# Altium PCB PCB_TRAFFIC LIGHT.PcbDoc
Units mm, origin at the board's own origin, x right, y up, seen from the top; angles counter-clockwise.
Board outline 100 x 100 mm, 2 copper layers (Top Layer, Bottom Layer); 35 components, 58 nets, 149 pads, 0 vias.
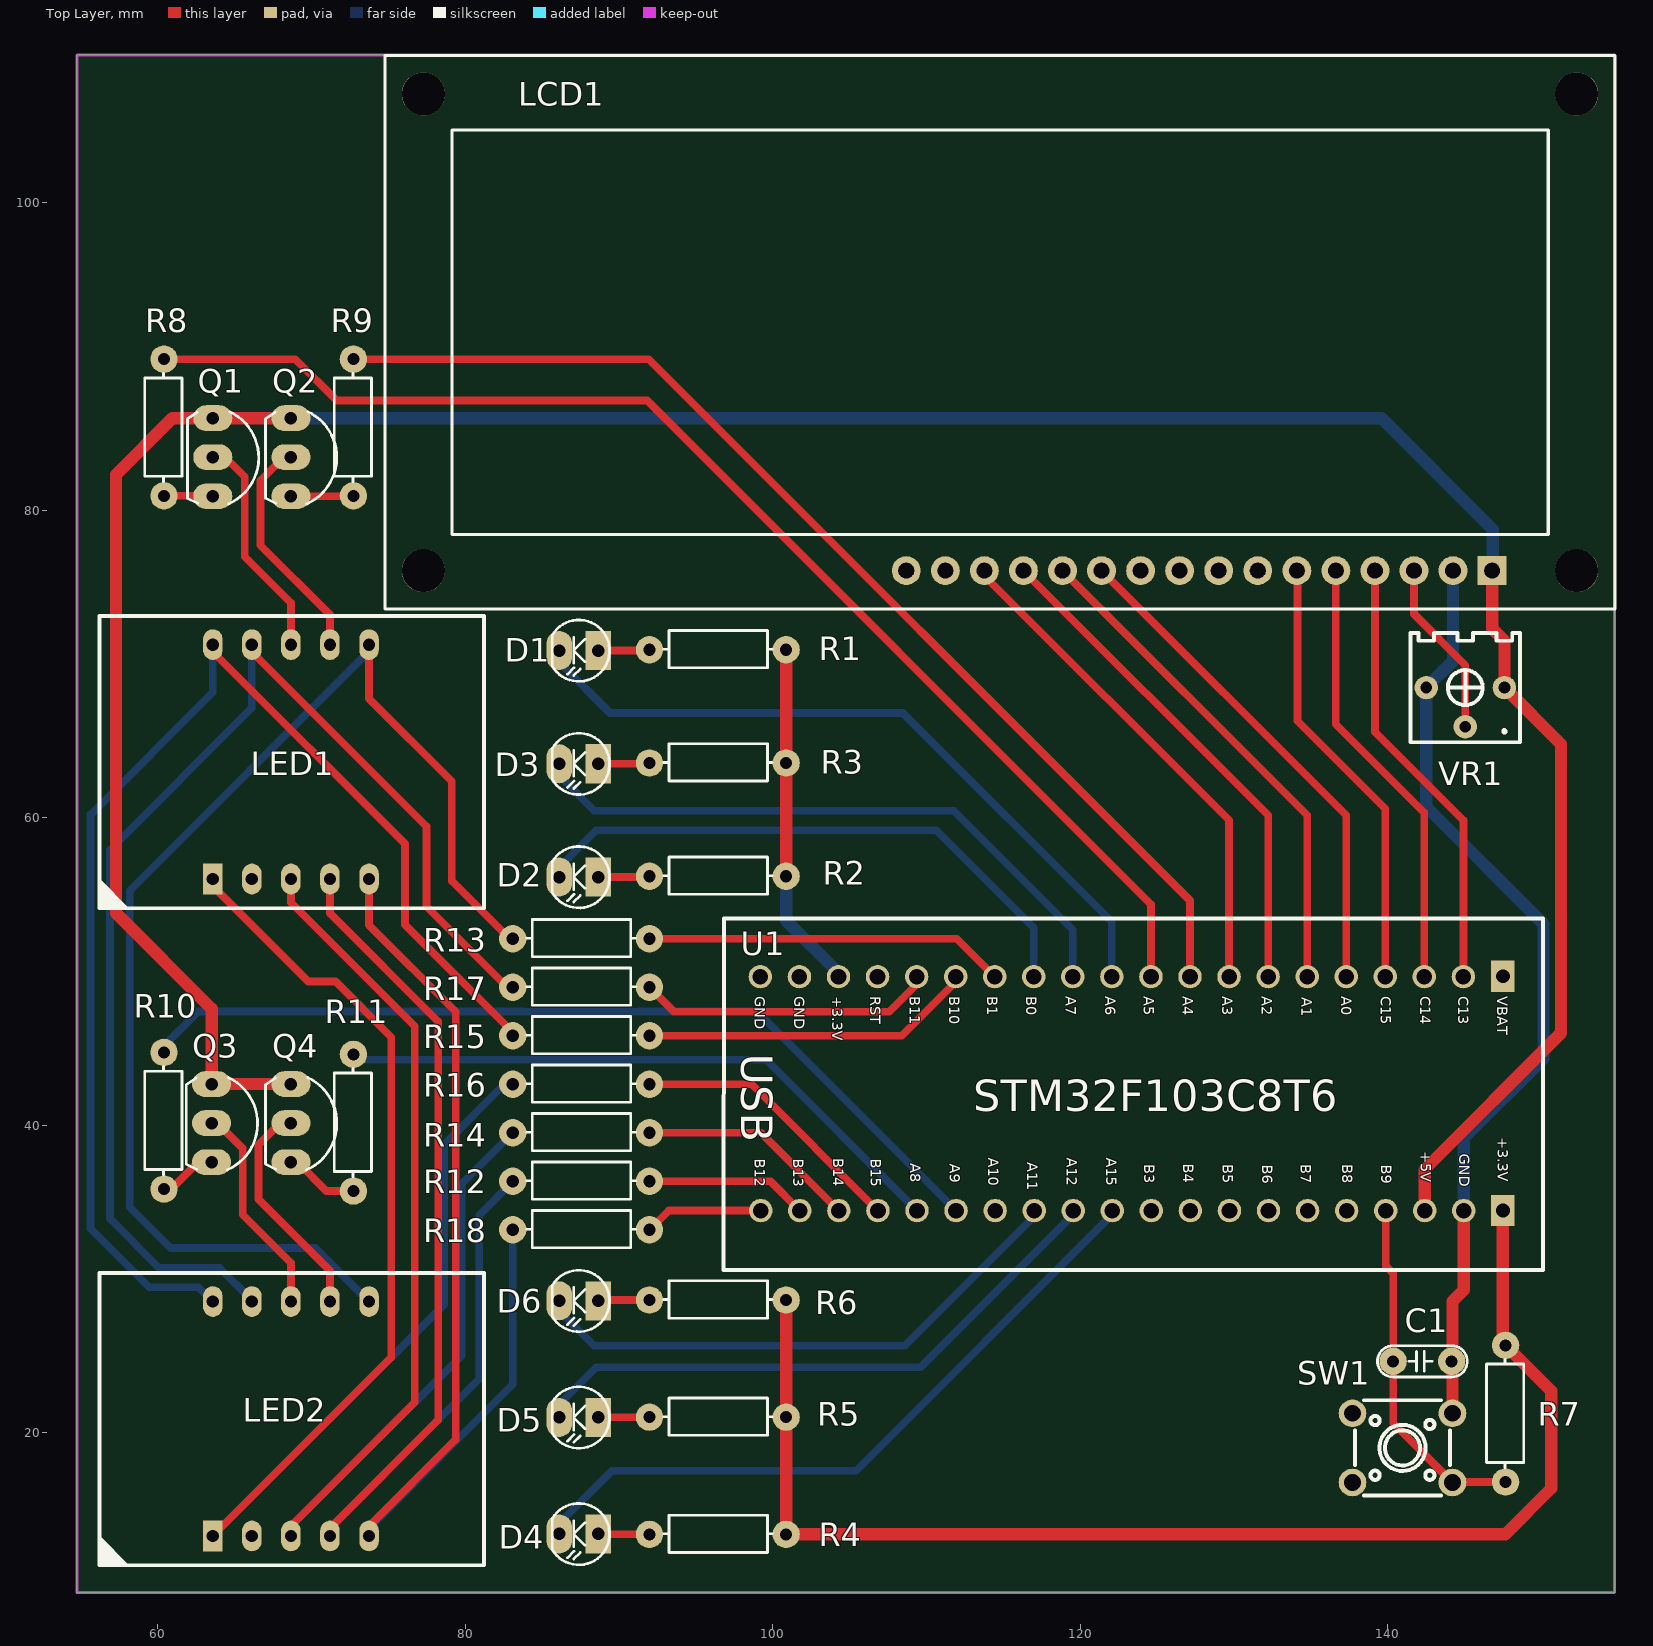
[diagram p0: Top Layer view]
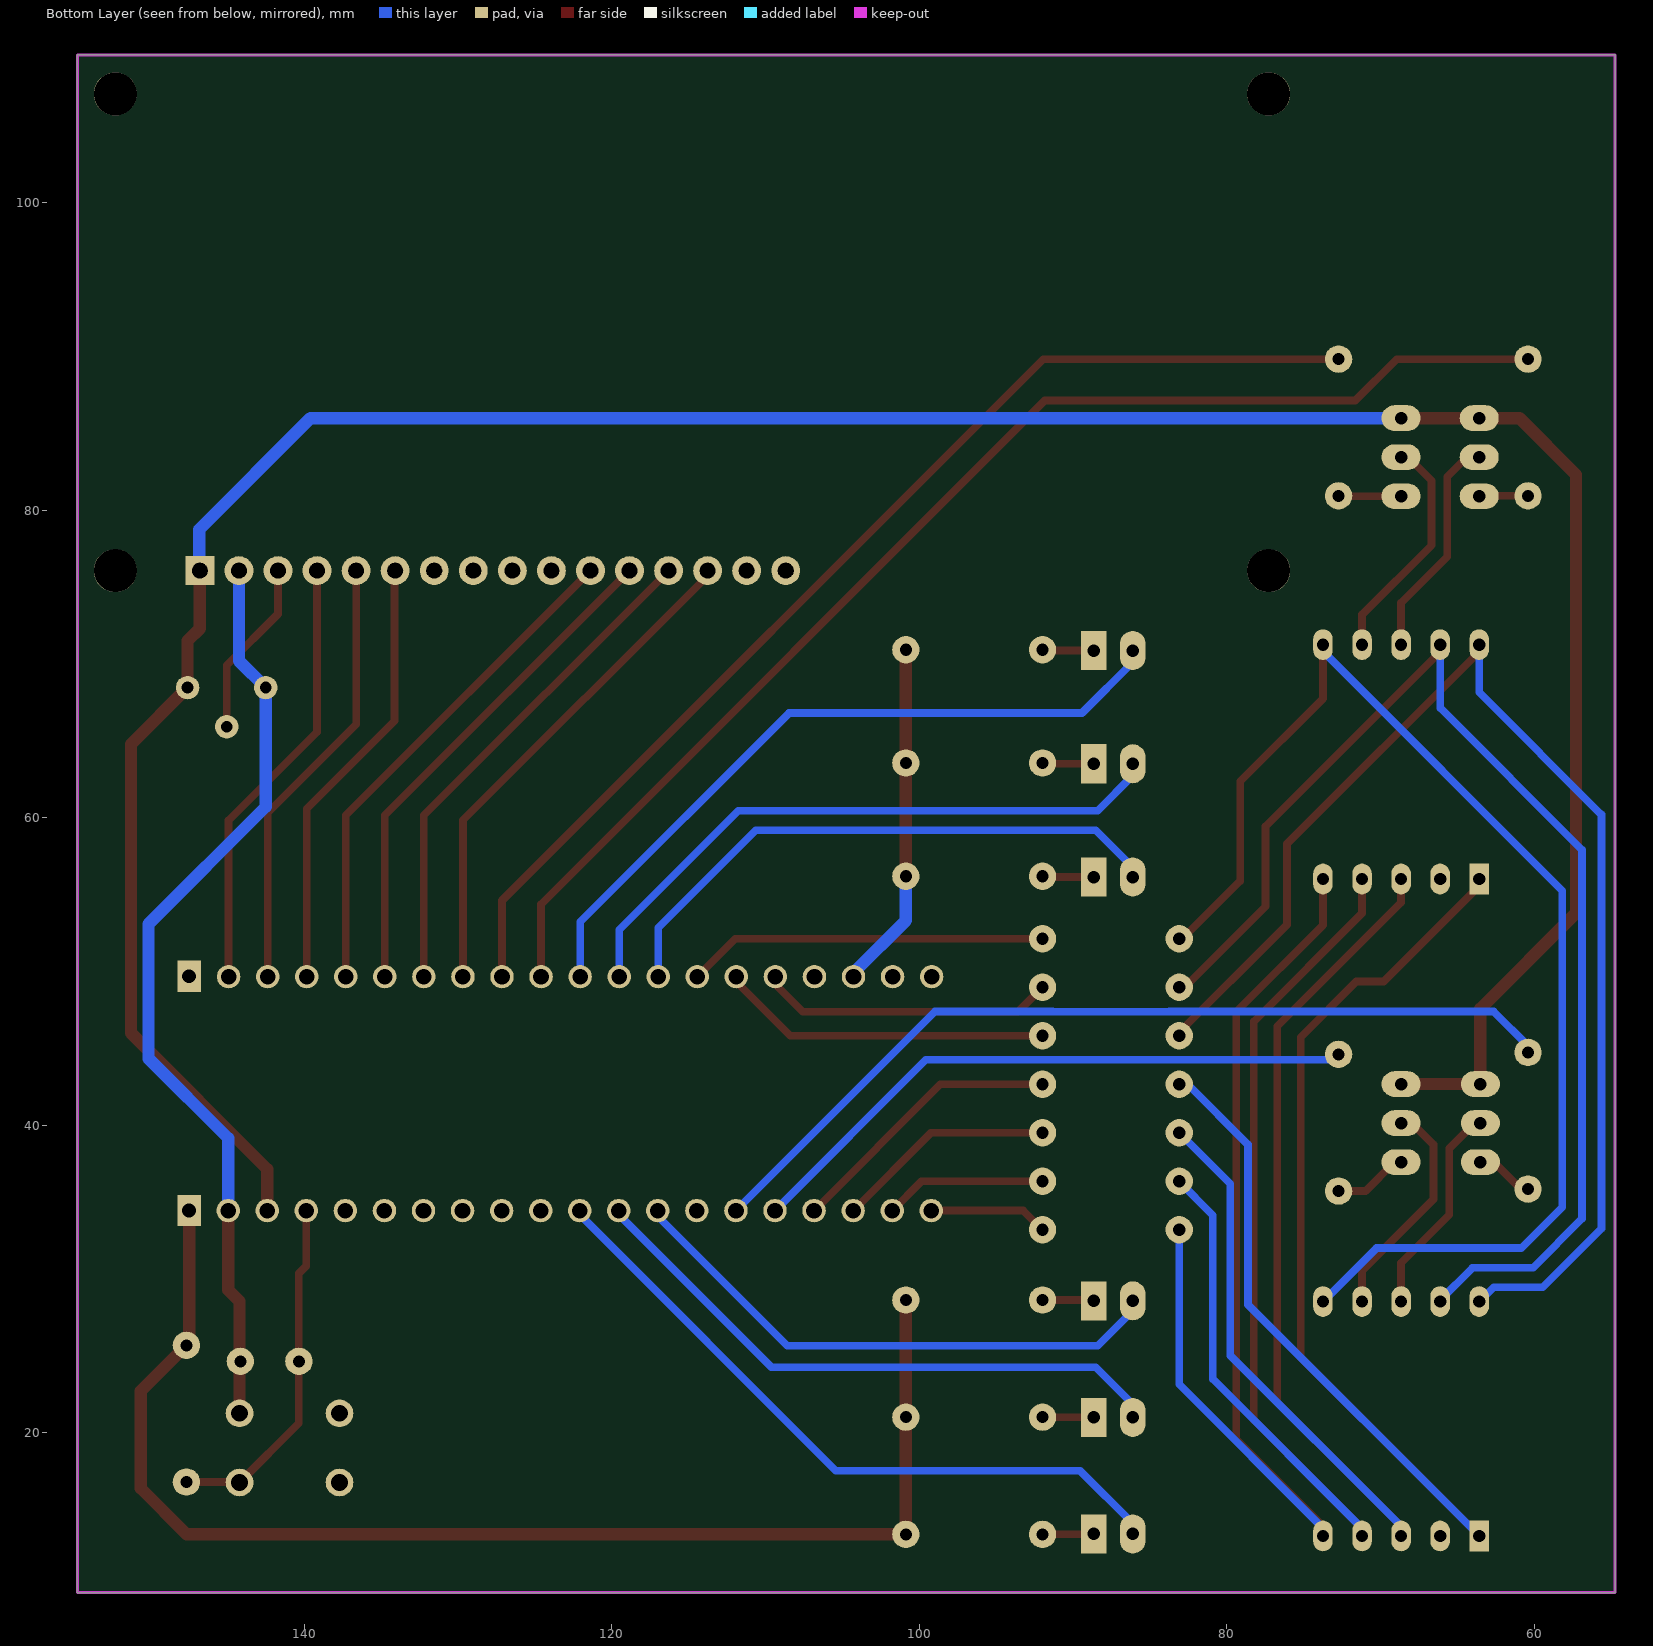
[diagram p1: Bottom Layer view, seen from below]
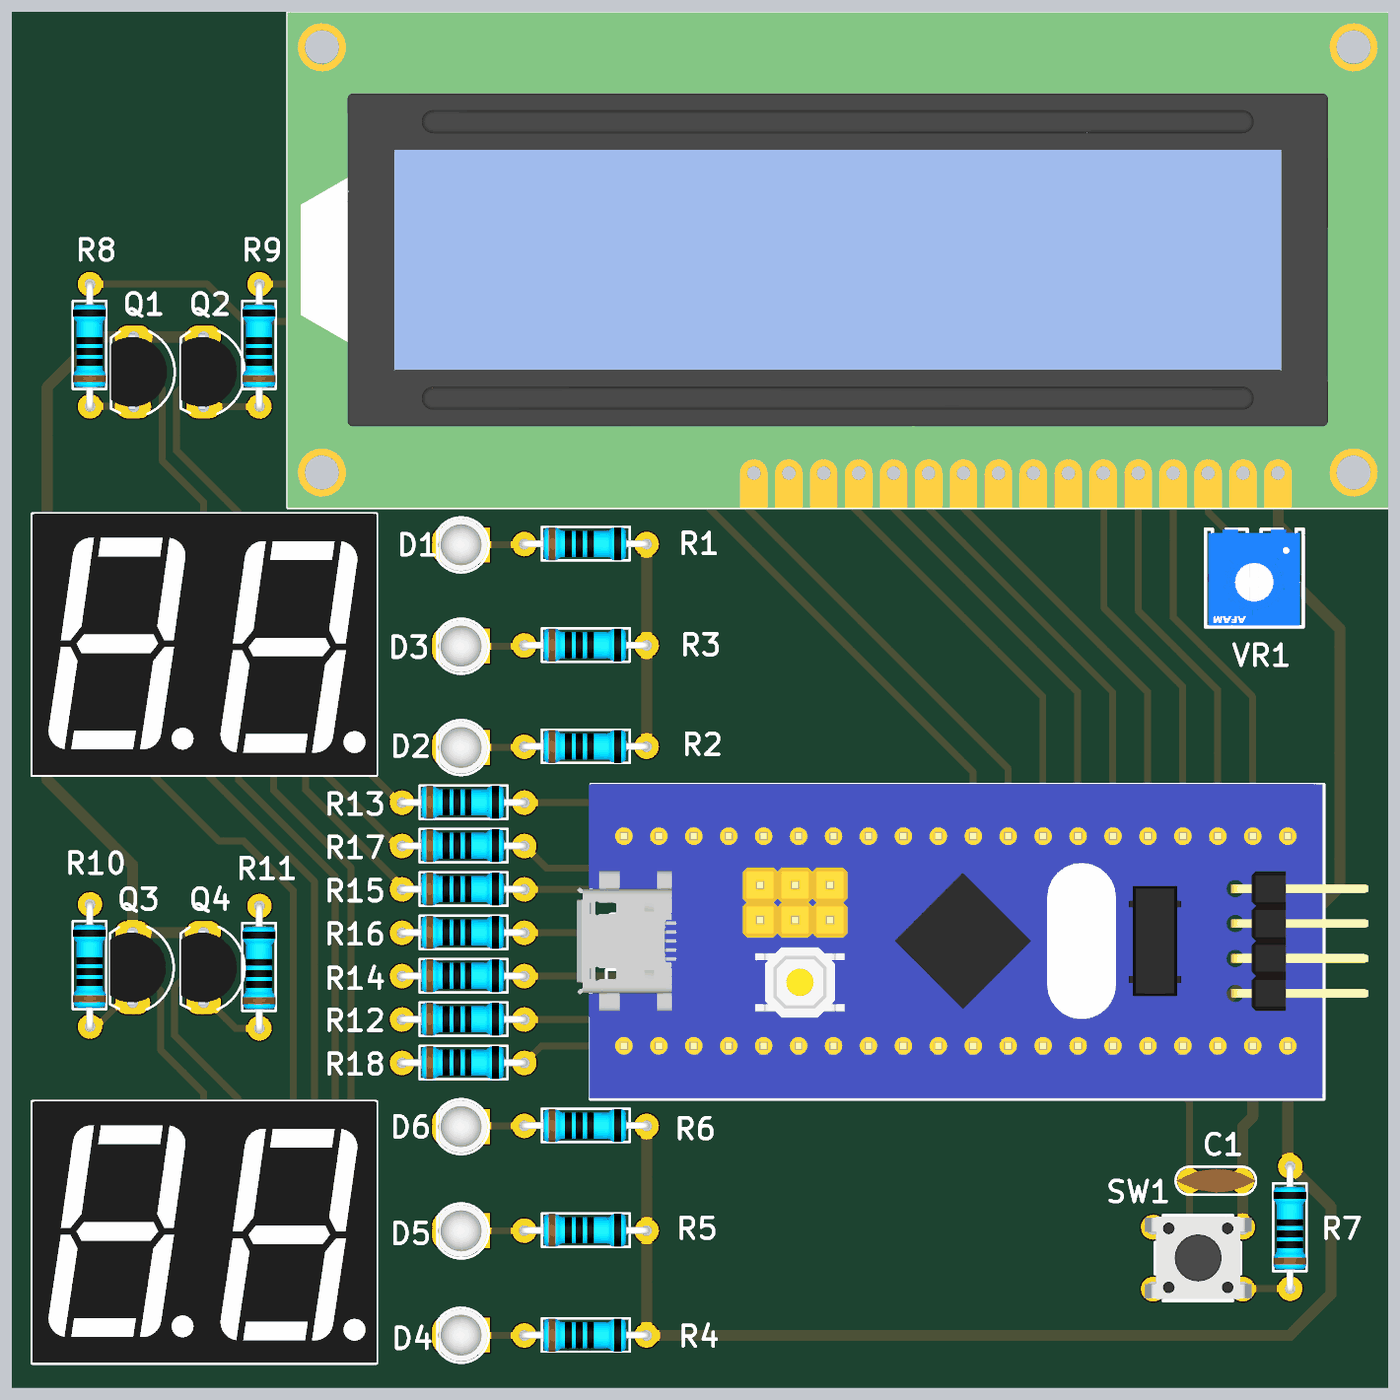
[diagram p2: 3D render of the assembled board from above, using the file's embedded part models]

## Layer stack, top to bottom
Top Solder: solder mask 0.0102, Solder Resist, Dk 3.5
Top Layer: signal copper 0.0356
Dielectric 1: dielectric 0.32, FR-4, Dk 4.8
Bottom Layer: signal copper 0.0356
Bottom Solder: solder mask 0.0102, Solder Resist, Dk 3.5

## Board outline
54.737,9.601 154.737,9.601 154.737,109.601 54.737,109.601

## Design rules (kind name [scope] priority, off if disabled: settings)
Clearance [All] p1: gap=0.432 ignorepadtopadclearanceinfootprint=FALSE
PolygonConnect [All] p1: connectstyle=Relief reliefconductorwidth=0.254 reliefentries=4 polygonreliefangle="90 Angle" airgapwidth=0.254
RoutingVias [All] p1: holewidth=0.711 width=1.27 viastyle="Through Hole" minholewidth=0.711 minwidth=1.27 maxholewidth=0.711 maxwidth=1.27
SolderMaskExpansion [All] p1: expansion=0.102
Width [All] p1: maxlimit=0.8 minlimit=0.254 preferedwidth=0.5 minimp=50.000000 maximp=50.000000 favimp=50.000000
30 further rules are at their usual default settings.

## Components (designator, comment, footprint, x,y, rotation, side; value= is the part's Value field where it differs from the comment)
C1 "100nF" CN1.5 140.335,24.638 r0 top
D1 "LED" LED-3 88.646,70.866 r180 top
D2 "LED" LED-3 88.646,56.134 r180 top
D3 "LED" LED-3 88.646,63.5 r180 top
D4 "LED" LED-3 88.646,13.411 r180 top
D5 "LED" LED-3 88.646,20.993 r180 top
D6 "LED" LED-3 88.646,28.575 r180 top
LCD1 "LCD 16x02" "LCD DISPLAYS 16X2" 114.408,90.424 r180 top
LED1 "5621BS" "LED 7 SEG-2 0.56 inch" 68.834,62.027 r0 top
LED2 "5621BS" "LED 7 SEG-2 0.56 inch" 68.834,19.304 r0 top
Q1 "A1015" TO-92 63.525,83.439 r270 top
Q2 "A1015" TO-92 68.605,83.439 r270 top
Q3 "A1015" TO-92 63.449,40.132 r270 top
Q4 "A1015" TO-92 68.605,40.132 r270 top
R1 "220R" "RES CHIPS HOLD 1/4W TYPE 350MIL" 97.536,69.088 r0 top
R2 "220R" "RES CHIPS HOLD 1/4W TYPE 350MIL" 97.536,54.356 r0 top
R3 "220R" "RES CHIPS HOLD 1/4W TYPE 350MIL" 97.536,61.722 r0 top
R4 "220R" "RES CHIPS HOLD 1/4W TYPE 350MIL" 97.536,11.557 r0 top
R5 "220R" "RES CHIPS HOLD 1/4W TYPE 350MIL" 97.536,19.177 r0 top
R6 "220R" "RES CHIPS HOLD 1/4W TYPE 350MIL" 97.536,26.797 r0 top
R7 "10K" "RES CHIPS HOLD 1/4W TYPE 350MIL" 149.479,22.352 r90 top
R8 "10K" "RES CHIPS HOLD 1/4W TYPE 350MIL" 62.23,86.487 r90 top
R9 "10K" "RES CHIPS HOLD 1/4W TYPE 350MIL" 74.549,86.487 r90 top
R10 "10K" "RES CHIPS HOLD 1/4W TYPE 350MIL" 62.23,41.402 r90 top
R11 "10K" "RES CHIPS HOLD 1/4W TYPE 350MIL" 74.549,41.275 r90 top
R12 "220R" "RES CHIPS HOLD 1/4W TYPE 350MIL" 88.646,34.523 r0 top
R13 "220R" "RES CHIPS HOLD 1/4W TYPE 350MIL" 88.646,50.292 r0 top
R14 "220R" "RES CHIPS HOLD 1/4W TYPE 350MIL" 88.646,37.677 r0 top
R15 "220R" "RES CHIPS HOLD 1/4W TYPE 350MIL" 88.646,43.984 r0 top
R16 "220R" "RES CHIPS HOLD 1/4W TYPE 350MIL" 88.646,40.83 r0 top
R17 "220R" "RES CHIPS HOLD 1/4W TYPE 350MIL" 88.646,47.138 r0 top
R18 "220R" "RES CHIPS HOLD 1/4W TYPE 350MIL" 88.646,31.369 r0 top
SW1 "Switch 6x6" "SWITCHES TACTILE DIP 6X6x5 mm" 141.097,18.923 r90 top
U1 "STM32F103C8T6" "MODULE STM32F103C8T6" 121.437,41.961 r270 top
VR1 "10K" "RES VARIABLE HOLE 3362P" 145.085,68.402 r180 top

## Footprints (in the part's own frame and the unit in brackets; to place one, negate y for a bottom-side part, rotate by r counter-clockwise, add the part's x,y. Pads: shape width x height; smd on the part's side, far side on the other; paste and mask are expansions set on the pad)
CN1.5 [mil]
  round 70 hole 31: 1(0,0) 2(150,0)
  silkscreen extent -40,-40 190,40, body extent -40,-33 190,33, height 235
"LCD DISPLAYS 16X2" [mil]
  rect 74x74 hole 40 slot 40.2 at 0 deg: 1(-1274.22,565.48)
  round 74 hole 40 slot 40.2 at 0 deg: 2(-1174.22,565.48) 3(-1074.22,565.48) 4(-974.22,565.48) 5(-874.22,565.48) 6(-774.22,565.48) 7(-674.22,565.48) 8(-574.22,565.48) 9(-474.22,565.48) 10(-374.22,565.48) 11(-274.22,565.48) 12(-174.22,565.48) 13(-74.22,565.48) 14(25.78,565.48) 15(125.78,565.48) 16(225.78,565.48)
  round 110.24 hole 110.24 unplated: ""(-1490.75,565.48) ""(-1490.75,-655) ""(1462,565.48) ""(1462,-655)
  silkscreen extent -1589,-753 1560,664, body extent -1589,-754 1561,663, height 478
"LED 7 SEG-2 0.56 inch" [mm]
  rect 1.27x2 hole 0.8: 1(-5.258,-6.02)
  oval 1.27x2 hole 0.8: 2(-2.718,-6.02) 3(-0.178,-6.02) 4(2.362,-6.02) 5(4.902,-6.02) 6(4.902,9.22) 7(2.362,9.22) 8(-0.178,9.22) 9(-2.718,9.22) 10(-5.258,9.22)
  silkscreen extent -12.62,-7.92 12.38,11.08, body extent -12.6,-7.9 12.4,11.1, height 8
LED-3 [mil] "LED 2 PIN, 3ly Only colour"
  rect 65x100 hole 32: 1(0,0)
  oval 65x100 hole 32: 2(100,0)
  silkscreen extent -29,-78 118,79, body extent -25,-75 113,75, height 217
"MODULE STM32F103C8T6" [mil]
  rect 80x60 hole 35.4: 1(-304,1025) 40(296,1025)
  round 60 hole 40: 2(-303,924) 3(-303,824) 4(-303,724) 5(-303,624) 6(-303,524) 7(-303,424) 8(-303,324) 9(-303,224) 10(-303,124) 11(-303,24) 12(-303,-76) 13(-303,-176) 14(-303,-276) 15(-303,-376) 16(-303,-476) 17(-303,-576) 18(-303,-676) 19(-303,-776) 20(-303,-876) 21(296,-875) 22(296,-775) 23(296,-675) 24(296,-575) 25(296,-475) 26(296,-375) 27(296,-275) 28(296,-175) 29(296,-75) 30(296,25) 31(296,125) 32(296,225) 33(296,325) 34(296,425) 35(296,525) 36(296,625) 37(296,725) 38(296,825) 39(296,925)
  silkscreen extent -452,-971 448,1128, body extent -454,-1010 446,1256, height 585
"RES CHIPS HOLD 1/4W TYPE 350MIL" [mil]
  round 70 hole 31: 1(-219,72) 2(131,72)
  silkscreen extent -183,26 95,121, body extent -231,26 139,120, height 97
"RES VARIABLE HOLE 3362P" [mil]
  round 60 hole 30: 1(-98,-2) 2(2,98) 3(102,-2)
  silkscreen extent -138,-142 142,138, body extent -129,-141 133,134, height 187
"SWITCHES TACTILE DIP 6X6x5 mm" [mm]
  round 1.8 hole 1.1: 1(-2.164,-3.099) 2(-2.164,3.404) 3(2.337,-3.099) 4(2.337,3.404)
  silkscreen extent -3.01,-2.95 3.19,3.25, body extent -2.9,-4.04 3.1,4.31, height 5
TO-92 [mil]
  oval 66x100 hole 32: 1(-100,2) 2(0,2) 3(100,2)
  silkscreen extent -117,-63 120,120, body extent -109,-64 109,97, height 245

## Part data
C1: library part "CAP 0805 50V 10%", "0805 Multilayer Ceramic Capacitors MLCC - SMD/SMT ROHS"
D1 D2 D3 D4 D5 D6: library part "LED SMD 0805", "Emerald 0805 Light Emitting Diodes (LED) ROHS", Supplier 1=RSComponents
LCD1: library part "LCD DISPLAYS 16x02", "LCD Displays Modules 16x02 5V ROHS"
LED1 LED2: library part "LED 7 SEG -2 0.56 inch"
Q1 Q2 Q3 Q4: library part "TRANSISTOR HOLD PNP", BOM_JLCPCB Part Class="Extended Part", BOM_Manufacturer=CJ(????/??), BOM_Manufacturer Part=2SA1015-TA, BOM_Supplier=LCSC, BOM_Supplier Part=C2084, Contributor=??EDA?????, spicePre=Q, spiceSymbolName=2SA1015-C2084
R1 R2 R3 R4 R5 R6 R7 R8 R9 R10 R11 R12 R13 R14 R15 R16 R17 R18: library part "RES HOLD 1%", Chung_Loai=Dán, Don_Vi=Con, Ma_Hang=MH005880, So_Chan=2
SW1: library part "SWITCHS TACTILE DIP 6x6mm", BOM_JLCPCB Part Class="Extended Part", BOM_Manufacturer=OMRON(???), BOM_Manufacturer Part=B3F-1000, BOM_Supplier=LCSC, BOM_Supplier Part=C93157, Contributor=LCSC, spicePre=S, spiceSymbolName=B3F-1000
U1: library part "MODULE STM32F103C8T6"
VR1: library part "RES VARIABLE HOLD 3P", "Plugin Variable Resistors/Potentiometers ROHS", Chung_Loai=C?m, Don_Vi=Con, Ma_Hang=MH000919, Ten_Linh_Kien="Bi?n Tr? Tam Giác 103-10K RM065 (Chân Ð?ng)"

## Nets (pads, with @x,y where several pads share a name; then routed paths per layer and width w, separated by ;. In a path a pad name is that pad's centre, name@x,y a point inside that pad or via, vN(x,y) a via of type N, cw(c..) or ccw(c..) an arc to the next point about the centre after c; other vN are vias at no path point)
3V3: R4.2 R5.2 R6.2 R7.2 U1.40 | length 85.6
  Top Layer w0.8: R6.2 R5.2 R4.2 147.625,13.386 150.622,16.383 150.622,22.708 R7.2 147.472,25.857 U1.40
3V3_1: R1.2 R2.2 R3.2 U1.18 | length 22.7
  Top Layer w0.8: R2.2 R3.2 R1.2
  Bottom Layer w0.5: U1.18 U1.18@104.267,49.911
  Bottom Layer w0.8: R2.2 100.863,53.315 U1.18@104.267,49.911
5V: LCD1.1 Q1.1 Q2.1 Q3.1 Q4.1 U1.38 VR1.1 | length 190.9
  Top Layer w0.8: Q4.1@68.326,42.672 Q3.1 63.5,47.57 57.277,53.793 57.277,82.296 60.96,85.979 Q1.1 Q2.1@68.58,85.979 ; U1.38 142.392,37.13 151.257,45.994 151.257,64.77 VR1.1 147.574,71.501 146.773,72.302 LCD1.1
  Bottom Layer w0.5: LCD1.1 LCD1.1@146.812,76.1
  Bottom Layer w0.8: Q2.1@68.58,85.979 139.573,85.979 146.812,78.74 LCD1.1@146.812,76.1
A: LED1.10 LED2.10 R15.1 | length 85
  Top Layer w0.5: LED1.10 63.576,70.79 76.073,58.293 76.073,53.035 R15.1@83.464,45.644
  Bottom Layer w0.5: LED2.10 62.636,29.464 59.436,29.464 55.626,33.274 55.626,60.198 63.576,68.148 LED1.10
B: LED1.9 LED2.9 R17.1 | length 82.3
  Top Layer w0.5: LED1.9 66.116,70.79 77.47,59.436 77.47,54.229 82.69,49.009 R17.1@83.21,49.009
  Bottom Layer w0.5: LED2.9 66.116,28.626 64.008,30.734 60.071,30.734 56.896,33.909 56.896,57.912 66.116,67.132 LED1.9
C: LED1.1 LED2.1 R16.1 | length 91.7
  Top Layer w0.5: LED2.1 75.184,24.892 75.184,45.72 71.564,49.34 69.787,49.34 63.576,55.55 LED1.1
  Bottom Layer w0.5: LED2.1 78.613,28.321 78.613,38.735 82.537,42.659 R16.1 ; LED1.1@63.576,55.423 LED1.1
D: LED1.4 LED2.4 R12.1 | length 76.6
  Top Layer w0.5: LED2.4 71.196,13.792 78.232,20.828 78.232,46.736 71.196,53.772 LED1.4
  Bottom Layer w0.5: LED2.4 71.196,13.792 80.899,23.495 80.899,34.138 R12.1@83.134,36.373
DIG1: LED1.8 Q1.2 | length 14.8
  Top Layer w0.5: Q1.2 64.389,83.439 65.659,82.169 65.659,76.962 68.656,73.965 LED1.8
DIG2: LED1.7 Q2.2 | length 14.7
  Top Layer w0.5: Q2.2@68.199,83.439 66.675,81.915 66.675,77.724 71.196,73.203 LED1.7
DIG3: LED2.8 Q3.2 | length 14
  Top Layer w0.5: Q3.2 63.881,40.132 65.532,38.481 65.532,34.163 68.656,31.039 LED2.8
DIG4: LED2.7 Q4.2 | length 14.5
  Top Layer w0.5: Q4.2@68.326,40.132 67.945,40.132 66.548,38.735 66.548,35.179 71.196,30.531 LED2.7
E: LED1.3 LED2.3 R14.1 | length 81.6
  Top Layer w0.5: LED2.3 68.656,13.919 76.708,21.971 76.708,46.431 68.656,54.483 LED1.3
  Bottom Layer w0.5: LED2.3 68.656,13.919 79.756,25.019 79.756,36.178 R14.1
F: LED1.6 LED2.6 R13.1 | length 84.4
  Top Layer w0.5: LED1.6 73.736,67.742 79.121,62.357 79.121,55.88 82.88,52.121 R13.1@83.21,52.121
  Bottom Layer w0.5: LED2.6 70.256,32.004 60.833,32.004 58.166,34.671 58.166,55.245 LED1.6@73.736,70.815 ; LED1.6@73.736,70.79 LED1.6@73.736,70.815 ; LED1.6 LED1.6@73.736,70.815
G: LED1.5 LED2.5 R18.1 | length 70.5
  Top Layer w0.5: LED1.5 73.736,53.01 79.375,47.371 79.375,19.558 LED2.5@73.8,13.983
  Bottom Layer w0.5: LED2.5 73.736,13.792 83.083,23.139 R18.1
GND: C1.2 LCD1.2 SW1.3 U1.39 VR1.3 | length 61.1
  Top Layer w0.8: SW1.3 144.196,28.545 144.932,29.281 U1.39
  Bottom Layer w0.8: LCD1.2 144.233,70.192 VR1.3 142.494,60.706 150.114,53.086 150.114,44.323 144.932,39.141 U1.39
NetD1_1: D1.1 R1.1 | length 3.3
  Top Layer w0.5: D1.1 91.923,70.866 R1.1
NetD2_1: D2.1 R2.1 | length 3.3
  Top Layer w0.5: D2.1 91.923,56.134 R2.1
NetD3_1: D3.1 R3.1 | length 3.3
  Top Layer w0.5: D3.1 91.923,63.5 R3.1
NetD4_1: D4.1 R4.1 | length 3.3
  Top Layer w0.5: D4.1 88.671,13.386 R4.1
NetD5_1: D5.1 R5.1 | length 3.3
  Top Layer w0.5: D5.1 88.659,21.006 R5.1
NetD6_1: D6.1 R6.1 | length 3.3
  Top Layer w0.5: D6.1 88.697,28.626 R6.1
NetLCD1_3: LCD1.3 VR1.2 | length 11.5
  Top Layer w0.5: LCD1.3 141.693,73.24 145.034,69.899 VR1.2
NetQ1_3: Q1.3 R8.1 | length 3.2
  Top Layer w0.5: R8.1 63.551,80.924 Q1.3
NetQ2_3: Q2.3 R9.1 | length 4.2
  Top Layer w0.5: Q2.3@68.58,80.899 72.695,80.899 R9.1
NetQ3_3: Q3.3 R10.1 | length 3.8
  Top Layer w0.5: R10.1 60.858,35.839 62.611,37.592 Q3.3
NetQ4_3: Q4.3 R11.1 | length 5.2
  Top Layer w0.5: Q4.3@68.326,37.592 Q4.3 69.088,37.592 70.968,35.712 R11.1
PA0: LCD1.11 U1.5 | length 33
  Top Layer w0.5: LCD1.11 137.287,60.147 U1.5
PA1: LCD1.12 U1.6 | length 33
  Top Layer w0.5: LCD1.12 134.747,60.147 U1.6
PA2: LCD1.13 U1.7 | length 33
  Top Layer w0.5: LCD1.13 132.207,60.147 U1.7
PA3: LCD1.14 U1.8 | length 33
  Top Layer w0.5: LCD1.14 113.753,75.731 129.667,59.817 U1.8
PA4: R9.2 U1.9 | length 73.9
  Top Layer w0.5: R9.2 91.923,89.814 127.127,54.61 U1.9
PA5: R8.2 U1.10 | length 83.6
  Top Layer w0.5: R8.2 68.936,89.814 71.628,87.122 91.821,87.122 124.587,54.356 U1.10
PA6: D1.2 U1.11 | length 47.3
  Bottom Layer w0.5: D1.2 86.106,70.104 89.408,66.802 108.458,66.802 122.047,53.213 U1.11
PA7: D3.2 U1.12 | length 41.4
  Bottom Layer w0.5: D3.2 86.106,62.738 88.392,60.452 111.76,60.452 119.507,52.705 U1.12
PA8: R11.2 U1.25 | length 40.9
  Bottom Layer w0.5: R11.2 73.08,44.242 99.572,44.242 U1.25
PA9: R10.2 U1.26 | length 58.2
  Bottom Layer w0.5: R10.2 60.401,45.161 62.624,47.384 83.734,47.384 83.747,47.371 91.31,47.371 91.323,47.384 98.971,47.384 U1.26
PA10: U1.27
PA11: D6.2 U1.28 | length 36.3
  Bottom Layer w0.5: D6.2 86.106,27.94 88.392,25.654 108.585,25.654 116.992,34.061 U1.28
PA12: D5.2 U1.29 | length 39.6
  Bottom Layer w0.5: D5.2 86.106,21.844 88.519,24.257 109.601,24.257 119.532,34.188 U1.29
PA15: D4.2 U1.30 | length 45.2
  Bottom Layer w0.5: D4.2 86.106,14.097 89.535,17.526 105.41,17.526 122.072,34.188 U1.30
PB0: D2.2 U1.13 | length 38.3
  Bottom Layer w0.5: D2.2 86.106,56.769 88.519,59.182 110.617,59.182 116.967,52.832 U1.13
PB1: R13.2 U1.14 | length 23.5
  Top Layer w0.5: R13.2 111.963,52.121 U1.14
PB3: U1.31
PB4: U1.32
PB5: U1.33
PB6: U1.34
PB7: U1.35
PB8: U1.36
PB9: C1.1 R7.1 SW1.1 U1.37 | length 22.9
  Top Layer w0.5: U1.37 139.852,30.836 140.335,30.353 C1.1 140.335,20.62 SW1.1 144.226,16.789 R7.1
PB10: R15.2 U1.15 | length 21.7
  Top Layer w0.5: R15.2 108.385,45.813 111.887,49.315 U1.15
PB11: R17.2 U1.16 | length 19.3
  Top Layer w0.5: R17.2 93.569,47.371 107.569,47.371 109.347,49.149 U1.16
PB12: R18.2 U1.21 | length 7.8
  Top Layer w0.5: R18.2 93.218,34.442 U1.21
PB13: R12.2 U1.22 | length 10.6
  Top Layer w0.5: R12.2 99.843,36.352 U1.22
PB14: R14.2 U1.23 | length 14.8
  Top Layer w0.5: R14.2 99.229,39.505 U1.23 U1.23@104.292,34.061
PB15: R16.2 U1.24 | length 18.3
  Top Layer w0.5: R16.2 98.616,42.659 U1.24
PC13: LCD1.4 U1.2 | length 28.8
  Top Layer w0.5: LCD1.4 139.153,65.571 144.907,59.817 U1.2
PC14: LCD1.5 U1.3 | length 28.8
  Top Layer w0.5: LCD1.5 136.613,66.079 142.367,60.325 U1.3
PC15: LCD1.6 U1.4 | length 28.8
  Top Layer w0.5: LCD1.6 134.112,76.022 134.112,66.294 139.827,60.579 U1.4
pads on no net: LCD1. LCD1.7 LCD1.8 LCD1.9 LCD1.10 LCD1.15 LCD1.16 LED1.2 LED2.2 SW1.2 SW1.4 U1.1 U1.17 U1.19 U1.20

## Keep-outs
Keep-Out Layer:
  the board outline again, w0.178

## Silkscreen, mask and mechanical layers (free items; w line width, h text height)
Mechanical 15:
  lines w0.003: 73.396,23.978 73.397,23.978 ; 73.65,59.284 73.651,59.284

## Text inside footprints (layer, text, board x,y; h text height)
U1: Top Overlay "VBAT" at 147.097,48.387 h0.7 r270; Top Overlay "C13" at 144.582,48.387 h0.7 r270; Top Overlay "C14" at 142.093,48.387 h0.7 r270; Top Overlay "C15" at 139.528,48.387 h0.7 r270; Top Overlay "A0" at 136.962,48.387 h0.7 r270; Top Overlay "A1" at 134.391,48.311 h0.7 r269; Top Overlay "A2" at 131.781,48.387 h0.7 r270; Top Overlay "A3" at 129.215,48.387 h0.7 r270; Top Overlay "A4" at 126.65,48.387 h0.7 r270; Top Overlay "A5" at 124.11,48.387 h0.7 r270; Top Overlay "A6" at 121.621,48.387 h0.7 r270; Top Overlay "A7" at 119.055,48.387 h0.7 r270; Top Overlay "B0" at 116.49,48.387 h0.7 r270; Top Overlay "B1" at 113.95,48.387 h0.7 r270; Top Overlay "B10" at 111.461,48.387 h0.7 r270; Top Overlay "B11" at 108.895,48.387 h0.7 r270; Top Overlay "RST" at 106.33,48.387 h0.7 r270; Top Overlay "+3.3V" at 103.866,48.387 h0.7 r270; Top Overlay "GND" at 101.377,48.387 h0.7 r270; Top Overlay "GND" at 98.812,48.387 h0.7 r270; Top Overlay "+3.3V" at 147.148,39.218 h0.7 r270; Top Overlay "GND" at 144.633,38.13 h0.7 r270; Top Overlay "+5V" at 142.144,38.291 h0.7 r270; Top Overlay "B9" at 139.579,37.412 h0.7 r270; Top Overlay "B8" at 137.013,37.442 h0.7 r270; Top Overlay "B7" at 134.321,37.442 h0.7 r270; Top Overlay "B6" at 131.832,37.412 h0.7 r270; Top Overlay "B5" at 129.266,37.442 h0.7 r270; Top Overlay "B4" at 126.701,37.475 h0.7 r270; Top Overlay "B3" at 124.161,37.442 h0.7 r270; Top Overlay "A15" at 121.672,37.876 h0.7 r270; Top Overlay "A12" at 119.106,37.876 h0.7 r270; Top Overlay "A11" at 116.541,37.589 h0.7 r270; Top Overlay "A10" at 114.001,37.876 h0.7 r270; Top Overlay "A9" at 111.512,37.475 h0.7 r270; Top Overlay "A8" at 108.946,37.506 h0.7 r270; Top Overlay "B15" at 106.381,37.813 h0.7 r270; Top Overlay "B14" at 103.917,37.843 h0.7 r270; Top Overlay "B13" at 101.321,37.821 h0.7 r270; Top Overlay "B12" at 98.837,37.813 h0.7 r270; Top Overlay "USB" at 97.927,44.653 h2.03 r270